# Altium PCB MainBoard.PcbDoc
Units mm, origin at the board's own origin, x right, y up, seen from the top; angles counter-clockwise.
Board outline 28.5 x 23.5 mm, 2 copper layers (Top1, Bottom4), stack 1.071 mm thick; 34 components, 52 nets, 216 pads, 114 vias.
Unrouted connection lines stored in the file: 28.
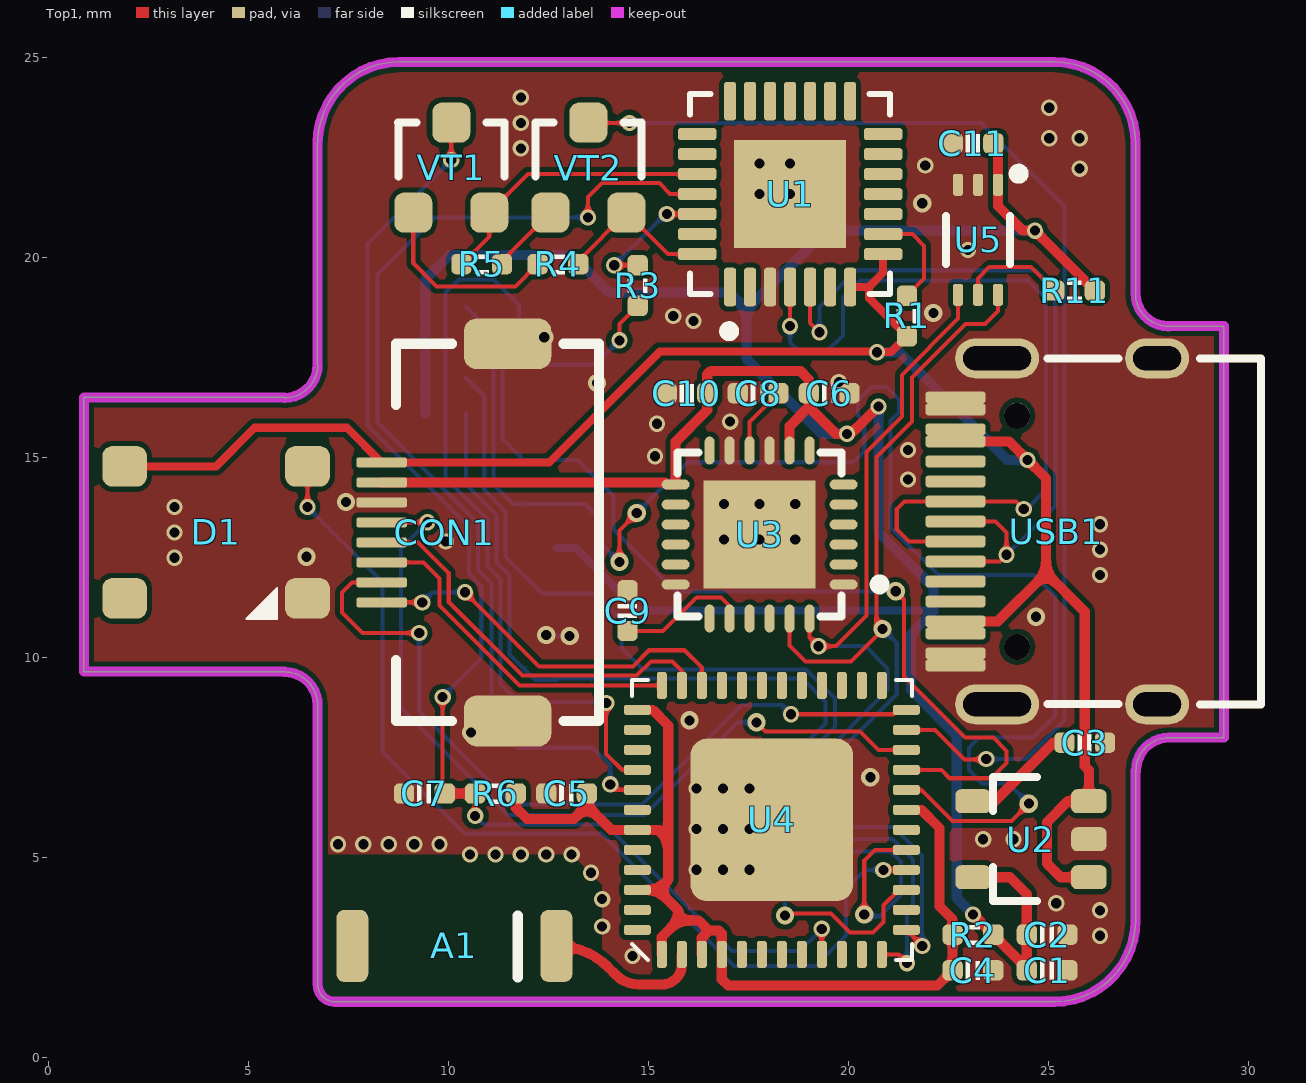
[diagram p0: Top1 view]
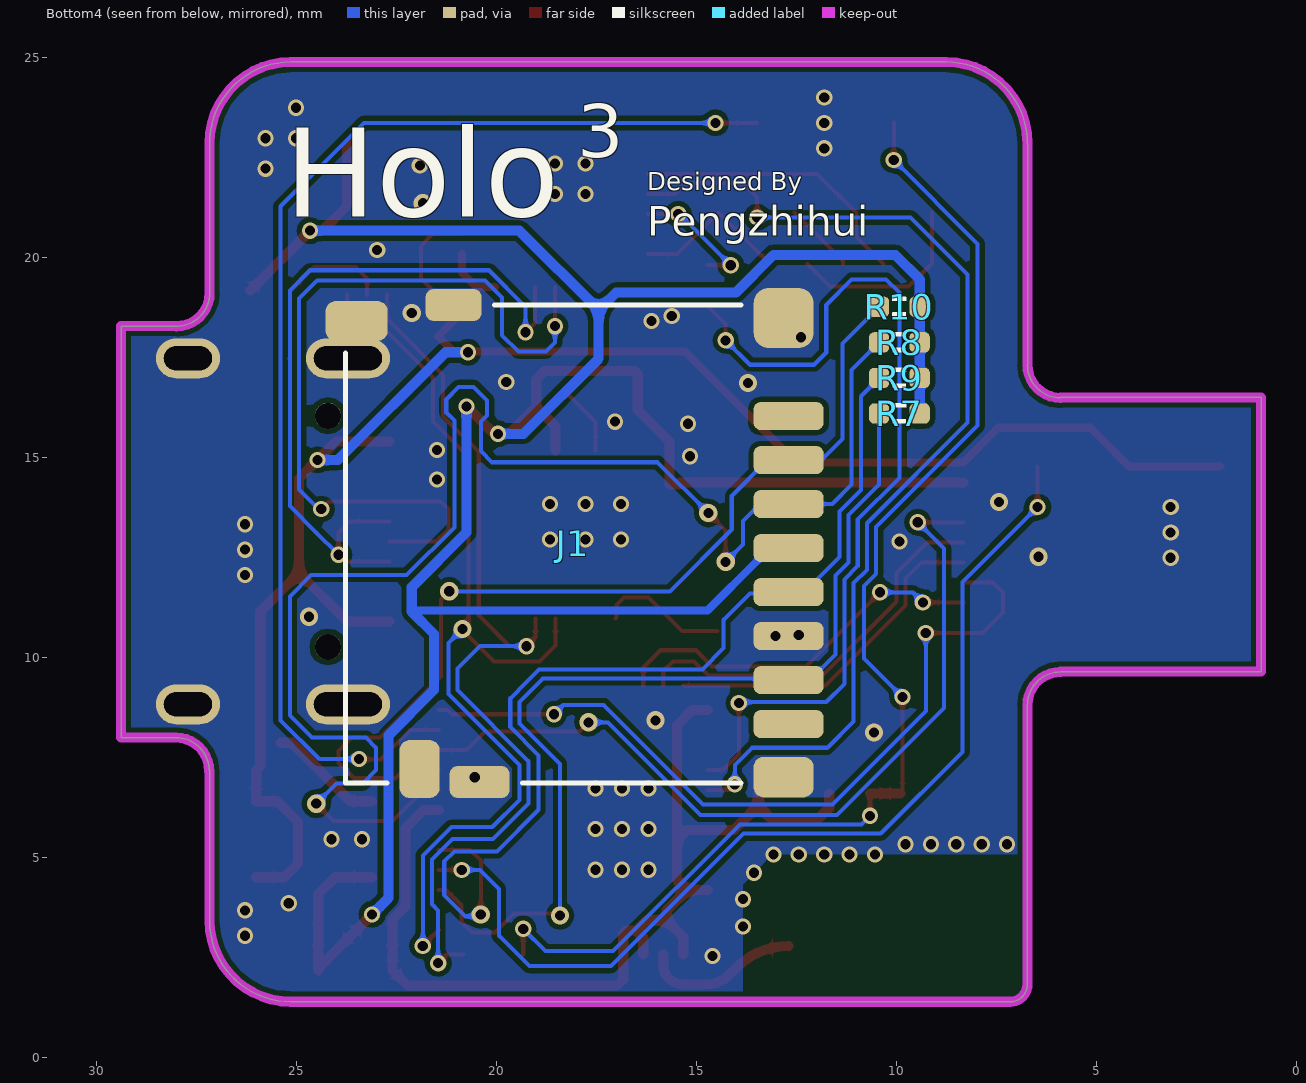
[diagram p1: Bottom4 view, seen from below]
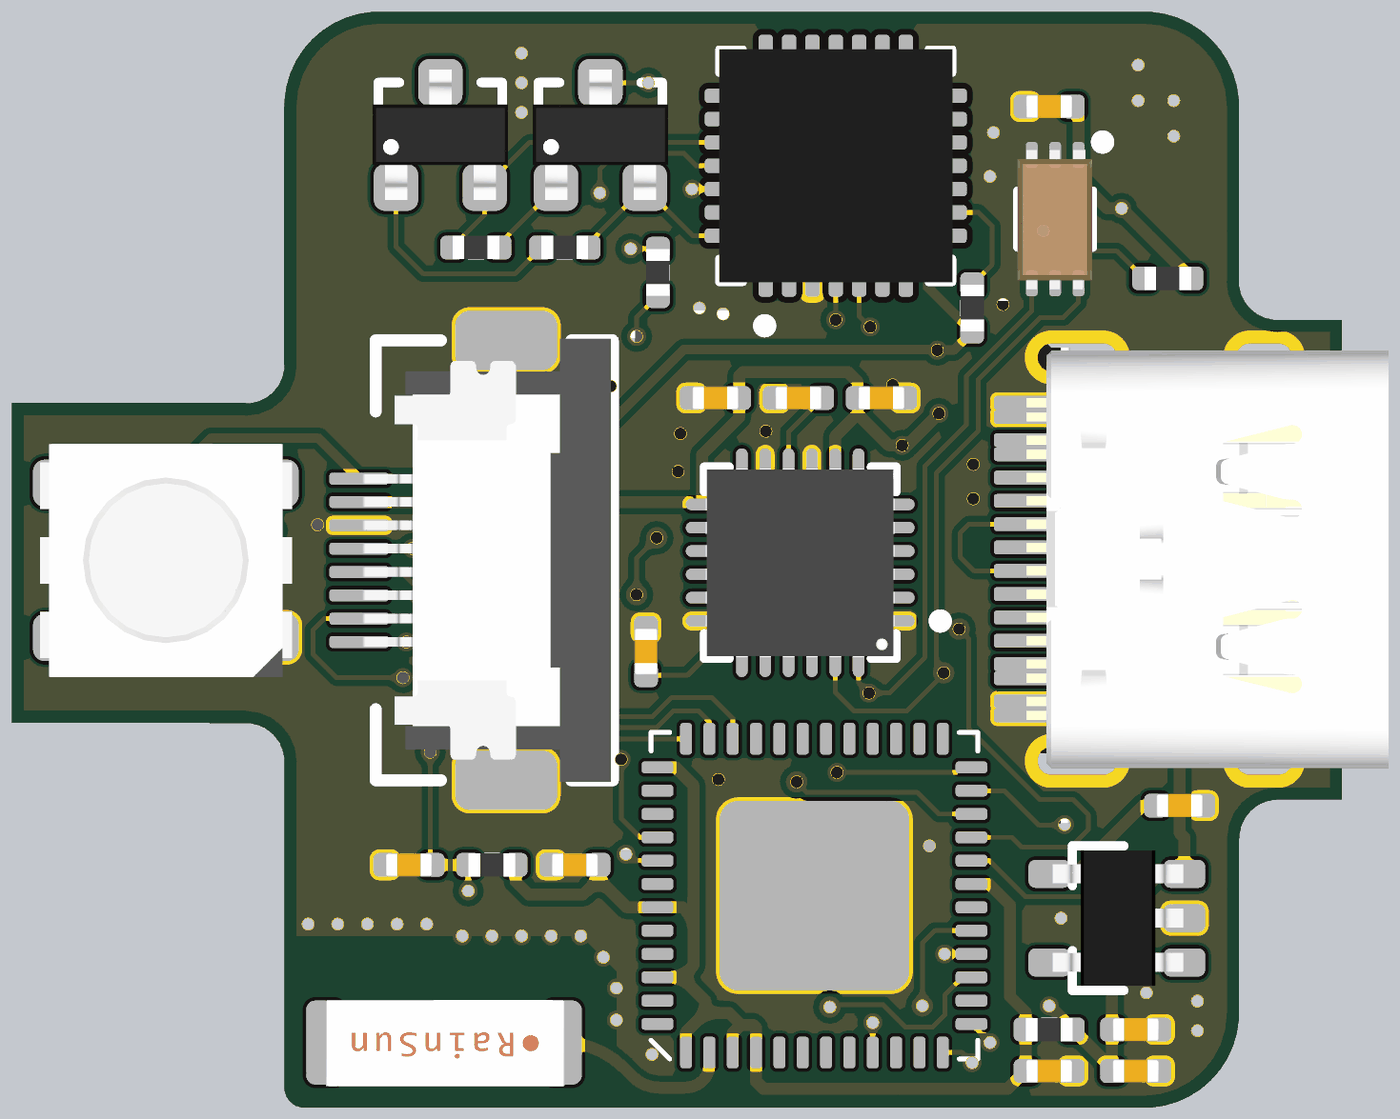
[diagram p2: 3D render of the assembled board from above, using the file's embedded part models]
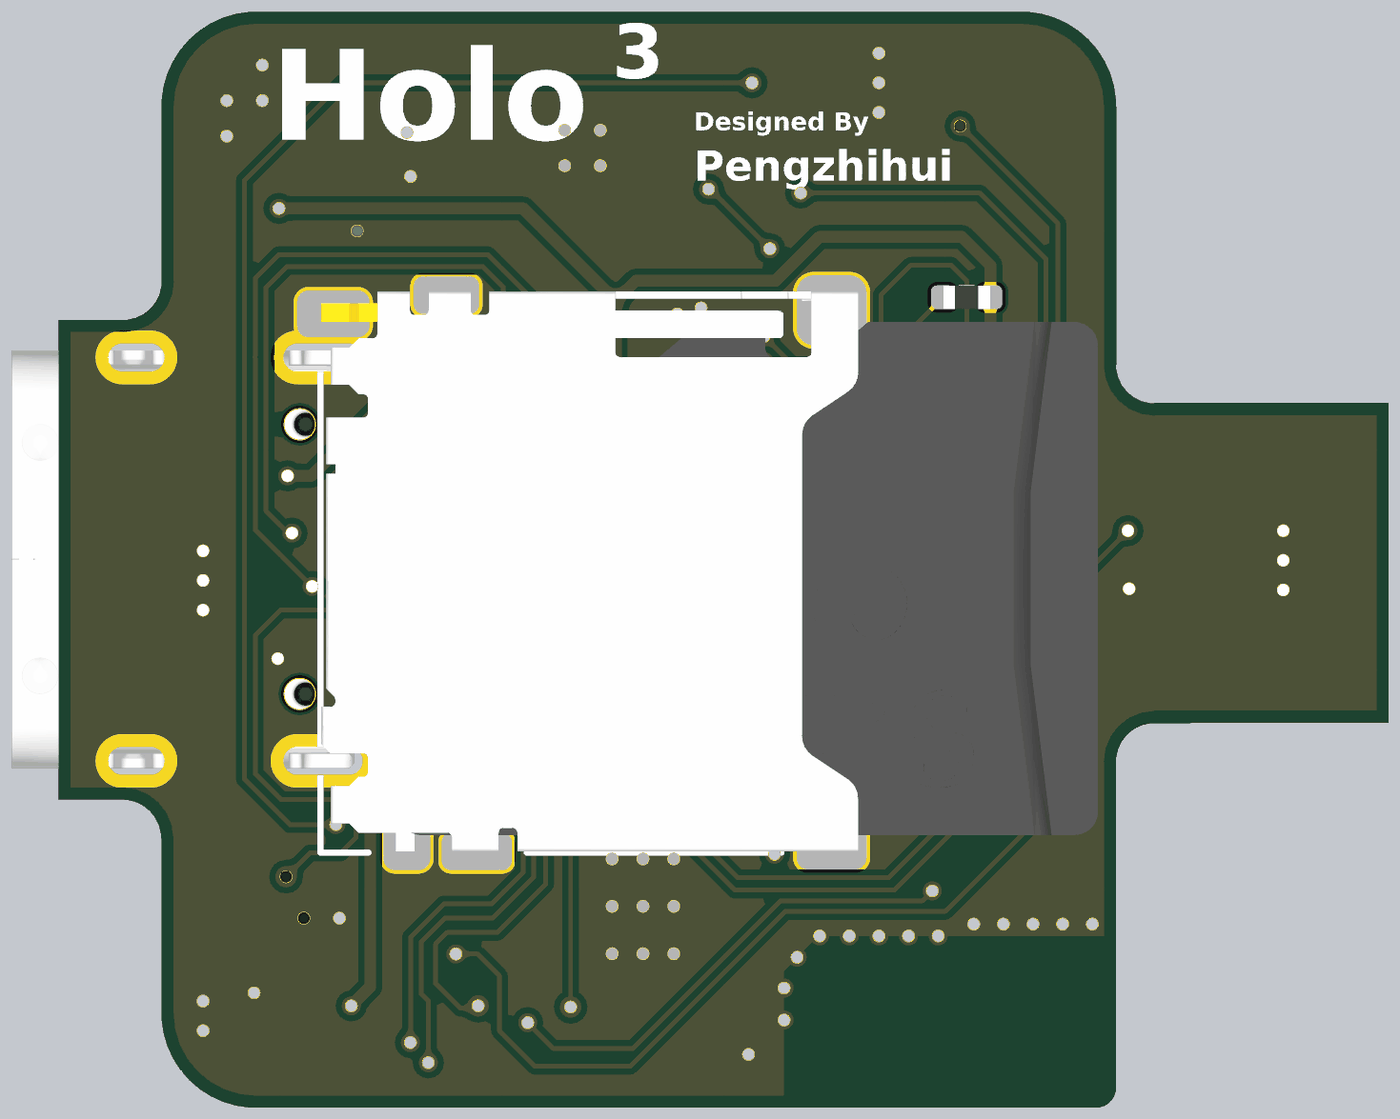
[diagram p3: 3D render of the assembled board from below, using the file's embedded part models]

## Layer stack, top to bottom
Top Solder: solder mask 0.0102, Solder Resist, Dk 3.5
Top1: signal copper 0.0356
Dielectric 2: core 1, PP-006, Dk 4.2
Bottom4: signal copper 0.0356
Bottom Solder: solder mask 0.0102, Solder Resist, Dk 3.5

## Board outline
5.903,9.642 cw(c5.903,8.814) 6.731,8.814 6.731,1.831 ccw(c7.165,1.831) 7.165,1.397 25.146,1.397 ccw(c25.146,3.429) 27.178,3.429 27.178,7.173 27.188,7.173 cw(c28.016,7.173) 28.016,8.001 29.388,8.001 29.388,18.288 28.003,18.288 28.003,18.286 cw(c28.003,19.113) 27.176,19.113 27.178,19.113 27.178,22.86 ccw(c25.146,22.86) 25.146,24.892 8.763,24.892 ccw(c8.763,22.86) 6.731,22.86 6.726,22.86 6.726,17.323 6.731,17.323 cw(c5.903,17.323) 5.903,16.495 5.903,16.505 0.889,16.505 0.889,9.652

## Design rules (kind name [scope] priority, off if disabled: settings)
Clearance [All] p1: gap=0.127 ignorepadtopadclearanceinfootprint=FALSE
ComponentClearance [All] p1: gap=0 collisioncheckmode=3 verticalgap=0 showdistances=FALSE
DiffPairsRouting [All] p1: maxlimit=0.229 minlimit=0.229 mostfreqgap=0.229 toplayer_minwidth=0.102 toplayer_maxwidth=0.102 toplayer_prefwidth=0.102 bottomlayer_minwidth=0.102 bottomlayer_maxwidth=0.102 bottomlayer_prefwidth=0.102 maxuncoupledlength=12.7
FanoutControl Fanout_BGA [All] p1: bgadir=Out bgaviamode=Centered fanoutstyle=Auto fanoutdirection=Alternating viagrid=0.025 // Fanout_BGA (Default Rule)
HoleSize [All] p1: absolutevalues=TRUE maxlimit=254 minlimit=0.203 maxpercent=80.000 minpercent=20.000
MinimumSolderMaskSliver [All] p1 off: minsoldermaskwidth=0.051
PlaneClearance [All] p1: clearance=0.203
PlaneConnect [All] p1: planeconnectstyle=Direct reliefexpansion=0.508 reliefentries=4 reliefconductorwidth=0.254 reliefairgap=0.254
PolygonConnect [All] p1: connectstyle=Direct reliefconductorwidth=0.254 reliefentries=4 polygonreliefangle="90 Angle" airgapwidth=0.254
RoutingVias [All] p1: holewidth=0.203 width=0.406 viastyle="Through Hole" minholewidth=0.152 minwidth=0.305 maxholewidth=0.711 maxwidth=1.27
SilkToBoardRegionClearance [All] p1 off:
SilkToSilkClearance [All] p1: silktosilkclearance=0
SilkToSolderMaskClearance [IsPad] p1: minsilkscreentomaskgap=0 clearancetoexposedcopper=TRUE
SolderMaskExpansion [All] p1: expansion=0.076 istentingtop=FALSE
Width [All] p1: maxlimit=254 minlimit=0.102 preferedwidth=0.102
20 further rules are at their usual default settings.

## Classes and differential pairs
net class GND: GND

## Components (designator, comment, footprint, x,y, rotation, side; value= is the part's Value field where it differs from the comment)
A1 "RAINSUN" ANT-Rainsun-AN5120 10.16,2.794 r180 top
C1 "0.1uF" CAP_0402 24.968,2.184 r180 top value=0.1u
C2 "10uF" CAP_0402 24.968,3.073 r180 top value=0.1u
C3 "10nF" CAP_0402 25.908,7.874 r180 top value=0.1u
C4 "10uF" CAP_0402 23.114,2.184 r180 top value=0.1u
C5 "0.1uF" CAP_0402 12.954,6.604 r0 top value=0.1u
C6 "10nF" CAP_0402 19.52,16.612 r0 top value=0.1u
C7 "0.1uF" CAP_0402 9.398,6.604 r180 top value=0.1u
C8 "0.1uF" CAP_0402 17.742,16.612 r180 top value=0.1u
C9 "2.2nF" CAP_0402 14.478,11.176 r270 top value=0.1u
C10 "0.1uF" CAP_0402 15.964,16.612 r0 top value=0.1u
C11 "0.1uF" CAP_0402 23.114,22.86 r180 top value=0.1u
CON1 "FFC_0.5_8" FFC_0.5_8 10.592,13.132 r90 top
D1 "RGB" LED_5050_WS2812B 4.191,13.132 r0 top
J1 "TF-Socket" "TF-Card-Amphenol with TF" 12.7,12.741 r90 bottom locked
R1 "10K" RES_0402 21.463,18.542 r90 top value=22R
R2 "0R" RES_0402 23.114,3.073 r180 top value=22R
R3 "200R" RES_0402 14.732,19.304 r90 top value=22R
R4 "12K" RES_0402 12.738,19.837 r180 top value=22R
R5 "12K" RES_0402 10.833,19.837 r0 top value=22R
R6 "10K" RES_0402 11.176,6.604 r180 top value=22R
R7 "10K" RES_0402 9.931,16.104 r0 bottom value=22R
R8 "10K" RES_0402 9.931,17.882 r0 bottom value=22R
R9 "10K" RES_0402 9.931,16.993 r0 bottom value=22R
R10 "10K" RES_0402 9.931,18.771 r0 bottom value=22R
R11 "10K" RES_0402 25.654,19.177 r0 top value=22R
U1 "CP2102" QFN-28 18.542,21.59 r90 top value=Value
U2 "LP2992 3V3" SOT23-5 24.511,5.461 r180 top
U3 "MPU6050" QFN-24 17.78,13.081 r180 top
U4 "ESP32_SIP" QFN-48_7X7 18.085,5.944 r90 top
U5 "BH1750FVI-TR" BH1750FVI 23.241,20.447 r270 top
USB1 "Type-C" Type-C-TOP 25.197,13.157 r0 top
VT1 "S8050" SMT_TRIODE_NPN 10.071,22.25 r0 top
VT2 "S8050" SMT_TRIODE_NPN 13.5,22.25 r0 top

## Footprints (in the part's own frame and the unit in brackets; to place one, negate y for a bottom-side part, rotate by r counter-clockwise, add the part's x,y. Pads: shape width x height; smd on the part's side, far side on the other; paste and mask are expansions set on the pad)
ANT-Rainsun-AN5120 [mm] "选择焊盘"
  rrect50% 0.8x1.8 smd: 1(-2.54,0) ""(2.563,0)
  silkscreen extent -1.57,-0.76 -1.57,0.79, body extent -2.57,-0.91 2.54,0.94, height 1.32
BH1750FVI [mm]
  rrect50% 0.55x0.25 smd paste+0 mask+0: 1(-1.375,0.5) 2(-1.375,0) 3(-1.375,-0.5) 4(1.375,-0.5) 5(1.375,0) 6(1.375,0.5)
  silkscreen extent -1.78,-0.8 0.6,1.14, body extent -1.49,-0.81 1.51,0.79, height 0.77
CAP_0402 [mil]
  rrect50% 20x20 smd: 1(-20,0) 2(20,0)
  silkscreen extent -7,-9 7,9, body extent -20,-10 20,10, height 20
FFC_0.5_8 [mil]
  rrect50% 50x86 smd: 0(-185.63,-35) 0(185.63,-35)
  rrect50% 10x50 smd: 1(-68.9,89) 2(-49.21,89) 3(-29.53,89) 4(-9.84,89) 5(9.84,89) 6(29.53,89) 7(49.21,89) 8(68.9,89)
  silkscreen extent -186,-125 186,75, body extent -187,-124 187,87, height 82
LED_5050_WS2812B [mil]
  rrect50% 44x40 smd: 1(-90,65) 2(-90,-65) 3(90,-65) 4(90,65)
  silkscreen extent 30,-85 60,-55, body extent -106,-98 106,98, height 69
QFN-24 [mm] "QFN, 24-Leads, Body 4.1x4.1mm (max), Pitch 0.50mm, IPC Low Density"
  oval 0.7x0.25 smd: 1(-2.1,1.25) 2(-2.1,0.75) 3(-2.1,0.25) 4(-2.1,-0.25) 5(-2.1,-0.75) 6(-2.1,-1.25) 13(2.1,-1.25) 14(2.1,-0.75) 15(2.1,-0.25) 16(2.1,0.25) 17(2.1,0.75) 18(2.1,1.25)
  oval 0.25x0.7 smd: 7(-1.25,-2.1) 8(-0.75,-2.1) 9(-0.25,-2.1) 10(0.25,-2.1) 11(0.75,-2.1) 12(1.25,-2.1) 19(1.25,2.1) 20(0.75,2.1) 21(0.25,2.1) 22(-0.25,2.1) 23(-0.75,2.1) 24(-1.25,2.1)
  rect 2.8x2.7 smd: ""(0,0)
  silkscreen extent -3.13,-2.05 2.05,2.05, body extent -2.02,-2.02 2.02,2.02, height 0.95
QFN-28 [mil]
  rrect50% 38x12 smd mask+5: 1(-91.5,59.06) 2(-91.5,39.37) 3(-91.5,19.68) 4(-91.5,0) 5(-91.5,-19.69) 6(-91.5,-39.37) 7(-91.5,-59.06) 15(91.5,-59.06) 16(91.5,-39.37) 17(91.5,-19.69) 18(91.5,0) 19(91.5,19.68) 20(91.5,39.37) 21(91.5,59.06)
  rrect50% 12x38 smd mask+5: 8(-59.06,-91.5) 9(-39.37,-91.5) 10(-19.68,-91.5) 11(0,-91.5) 12(19.69,-91.5) 13(39.37,-91.5) 14(59.06,-91.5) 22(59.06,91.5) 23(39.37,91.5) 24(19.69,91.5) 25(0,91.5) 26(-19.68,91.5) 27(-39.37,91.5) 28(-59.06,91.5)
  rect 106.3x110.24 smd: 29(0,0)
  silkscreen extent -140,-98 98,98, body extent -98,-98 98,98, height 35
QFN-48_7X7 [mm]
  rrect20% 4.064x4.064 smd: 0(0,0)
  rrect50% 0.675x0.25 smd: 1(-3.363,2.75) 2(-3.363,2.25) 3(-3.363,1.75) 4(-3.363,1.25) 5(-3.363,0.75) 6(-3.363,0.25) 7(-3.363,-0.25) 8(-3.363,-0.75) 9(-3.363,-1.25) 10(-3.363,-1.75) 11(-3.363,-2.25) 12(-3.363,-2.75) 25(3.363,-2.75) 26(3.363,-2.25) 27(3.363,-1.75) 28(3.363,-1.25) 29(3.363,-0.75) 30(3.363,-0.25) 31(3.363,0.25) 32(3.363,0.75) 33(3.363,1.25) 34(3.363,1.75) 35(3.363,2.25) 36(3.363,2.75)
  rrect50% 0.25x0.675 smd: 13(-2.75,-3.363) 14(-2.25,-3.363) 15(-1.75,-3.363) 16(-1.25,-3.363) 17(-0.75,-3.363) 18(-0.25,-3.363) 19(0.25,-3.363) 20(0.75,-3.363) 21(1.25,-3.363) 22(1.75,-3.363) 23(2.25,-3.363) 24(2.75,-3.363) 37(2.75,3.363) 38(2.25,3.363) 39(1.75,3.363) 40(1.25,3.363) 41(0.75,3.363) 42(0.25,3.363) 43(-0.25,3.363) 44(-0.75,3.363) 45(-1.25,3.363) 46(-1.75,3.363) 47(-2.25,3.363) 48(-2.75,3.363)
  silkscreen extent -3.5,-3.5 3.5,3.5, body extent -3.5,-3.5 3.5,3.5, height 1
RES_0402 [mil]
  rrect50% 20x20 smd: 1(-20,0) 2(20,0)
  silkscreen extent -7,-10 7,10, body extent -20,-10 20,10, height 14
SMT_TRIODE_NPN [mm] "Surface mount NPN transistor, package SOT-23"
  rrect50% 0.95x1 smd: 1(-0.95,-1.125) 2(0.95,-1.125) 3(0,1.125)
  silkscreen extent -1.33,-0.22 1.32,1.13, body extent -1.45,-1.4 1.45,1.4, height 1.3
SOT23-5 [mm] "SOT23, 3-Leads, Body 3.1x3.0mm (max), Pitch 0.95mm, IPC Medium Density"
  rrect50% 0.889x0.6 smd: 1(-1.5,0.95) 2(-1.5,0) 3(-1.5,-0.95) 4(1.396,-0.95) 5(1.396,0.95)
  silkscreen extent -0.2,-1.55 0.9,1.55, body extent -1.48,-1.45 1.32,1.45, height 1.2
"TF-Card-Amphenol with TF" [mm]
  rrect50% 0.7x1.75 smd: 1(3.3,0) 2(2.2,0) 3(1.1,0) 4(0,0) 5(-1.1,0) 6(-2.2,0) 7(-3.3,0) 8(-4.4,0)
  rrect50% 1x1.55 smd: 9(5.675,10.8)
  rrect50% 1.45x1 smd: 10(-5.525,9.225)
  rrect50% 1.5x1.5 smd: S1(5.75,0.125)
  rrect50% 1.016x1.5 smd: S2(-5.727,0.125)
  rrect50% 0.8x1.4 smd: S3(6.075,8.375)
  rrect50% 0.8x1.5 smd: S4(-5.85,7.725)
  silkscreen extent -5.87,1.19 6.07,11.07, body extent -5.85,-5.58 6.15,11.06, height 1.69
Type-C-TOP [mm]
  round 0.65 hole 0.65: 0(-0.98,-2.89) 0(-0.98,2.89)
  oval 1.6x1 hole 0.6 slot 1.2 at 0 deg: 1(2.52,4.325) 2(2.52,-4.325)
  oval 2.1x1 hole 0.6 slot 1.7 at 0 deg: 3(-1.48,-4.325) 4(-1.48,4.325)
  rrect50% 1.5x0.3 smd: A1(-2.52,-3.35) A4(-2.52,-2.55) A5(-2.52,-1.25) A6(-2.52,-0.25) A7(-2.52,0.25) A8(-2.52,1.25) A9(-2.52,2.55) A12(-2.52,3.35) B1(-2.52,3.05) B4(-2.52,2.25) B5(-2.52,1.75) B6(-2.52,0.75) B7(-2.52,-0.75) B8(-2.52,-1.75) B9(-2.52,-2.25) B12(-2.52,-3.05)
  silkscreen extent -0.22,-4.33 5.12,4.33, body extent -2.57,-4.48 5.18,4.48, height 3.26

## Part data
A1: library part ANT-Rainsun-AP5120
C1 C2 C3 C4 C5 C6 C7 C8 C9 C10 C11: library part 电容-0402, "Capacitor"
CON1: "FFC", System=Connector
D1: library part LED_5050_WS2812B, "LED", Type=5050
J1: "10 _8 + 2_ Position Card Connector Secure Digital - microSDâ„¢ Surface Mount, Right Angle Gold", Package=None, Availability=Unavailable, MF="Amphenol Commercial Products", MP=1140084168, Price=None, SnapEDA_Link=https://www.snapeda.com/parts/1140084168/Amphenol/view-part/4544529/?ref=snap
R1 R2 R3 R4 R5 R6 R7 R8 R9 R10 R11: library part 电阻-0402, "Resistor"
U1: "USB转TTL", MFG #1="SILICON LABS", PART DESC="SINGLE-CHIP USB TO UART BRIDGE, QFN28, RoHS.", PART NUMBER=CP2102, RefDes=RefDes, Type=DEV
U2: library part LP2992, "LDO"
U3: "六轴传感器"
U4: library part ESP32-PICO
USB1: library part USB-Type-C-TOP
VT1 VT2: library part SMT_TRIODE_NPN, "Surface mount NPN transistor, package SOT-23"

## Via types
v1: diameter 0.406, hole 0.254, Top1 to Bottom4, tented both sides, 94 vias
v2: diameter 0.457, hole 0.254, Top1 to Bottom4, tented both sides, 20 vias

## Nets (pads, with @x,y where several pads share a name; then routed paths per layer and width w, separated by ;. In a path a pad name is that pad's centre, name@x,y a point inside that pad or via, vN(x,y) a via of type N, cw(c..) or ccw(c..) an arc to the next point about the centre after c; other vN are vias at no path point)
3V3: C1.2 C2.2 C6.1 C10.2 C11.1 CON1.7 J1.4 R2.1 R7.1 R8.1 R9.1 R10.1 R11.2 U2.5 U3.8 U3.13 U5.1 | length 76.6
  Top1 w0.254: CON1.7 15.408,14.382 15.459,14.331 U3.13 15.68,15.401 16.472,16.192 C10.2 16.472,17.081 16.561,17.17 18.796,17.17 19.012,16.954 C6.1 19.012,16.269 ; U3.8 18.53,15.787 19.012,16.269 ; v1(20.752,16.281) 20.066,15.596 19.685,15.596 19.012,16.269 ; v1(23.114,3.581) R2.1 C1.2@24.46,2.235 ; U2.5 24.039,4.511 24.46,4.089 C2.2 C1.2@24.46,2.235 ; C11.1 23.741,22.741 U5.1 23.741,21.293 24.359,20.676 v1(24.663,20.676) R11.2 ; C1.2 C1.2@24.46,2.235
  Bottom4 w0.203: J1.4 13.185,12.741 13.473,12.453 13.473,12.435 14.732,11.176 22.123,11.176
  Bottom4 w0.254: R7.1 R9.1 R8.1 R10.1 9.423,19.456 10.033,20.066 13.081,20.066 14.021,19.126 17.018,19.126 17.45,18.694 ; v1(19.964,15.596) 19.329,15.596 17.45,17.475 17.45,18.694 ; v1(20.752,16.281) 20.752,13.132 22.123,11.76 22.123,11.151 21.565,10.592 21.565,9.195 22.708,8.052 22.708,3.988 v1(23.114,3.581) ; v1(24.663,20.676) 19.431,20.676 17.45,18.694
3V3A: C4.2 C5.2 R2.2 R6.1 U4.1 U4.3 U4.4 U4.19 U4.37 U4.43 U4.46 | length 26.5
  Top1 w0.254: R6.1 11.684,6.248 11.963,5.969 13.132,5.969 13.462,6.299 ; C5.2 13.462,6.299 ; U4.46 15.237,4.194 ; U4.37 15.106,8.694 15.494,8.306 15.494,5.461 ; U4.1 15.335,3.016 15.748,3.429 ; U4.3 16.335,3 16.51,3.175 ; U4.19 21.823,6.194 22.276,5.74 22.276,3.785 22.606,3.454 R2.2 C4.2 22.225,1.803 16.993,1.803 16.835,1.961 U4.4 16.835,3.104 16.764,3.175 16.51,3.175 ; 13.462,6.299 14.068,5.694 U4.43 15.261,5.694 15.494,5.461 ; 15.237,4.194 15.494,4.45 15.494,5.461 ; 15.237,4.194 15.748,3.683 15.748,3.429 ; 15.748,3.429 16.256,3.429 16.51,3.175
BH_SCL: U3.23 U4.13 U5.6 | length 24.5
  Top1 w0.102: U3.23 18.53,10.299 18.923,9.906 20.066,9.906 20.853,10.693 v2(20.853,10.719) 20.701,10.871 20.701,15.011 21.59,15.9 21.59,17 22.929,18.339 23.419,18.339 23.741,18.661 U5.6 ; U4.13 v1(21.847,2.794)
  Bottom4 w0.102: v2(20.853,10.719) 21.209,10.363 21.209,9.093 19.431,7.315 19.431,6.445 20.11,5.766 21.133,5.766 21.844,5.055 21.844,2.797 v1(21.847,2.794)
BH_SDA: U3.24 U4.12 U5.4 | length 23.7
  Top1 w0.102: U3.24 19.03,10.51 v1(19.253,10.287) 19.685,10.287 20.447,11.049 20.447,15.138 21.336,16.027 21.336,17.069 22.741,18.474 U5.4 ; U4.12 21.244,2.581 v1(21.463,2.362)
  Bottom4 w0.102: v1(19.253,10.287) 20.422,10.287 20.98,9.728 20.98,9.188 19.202,7.41 19.202,7.391 19.202,6.35 20.091,5.461 21.107,5.461 21.615,4.953 21.615,3.835 21.463,3.683 v1(21.463,2.362)
CP_Rx: U1.25 U4.41 | length 26.3
  Top1 w0.102: v1(13.487,21.006) 13.487,21.514 13.835,21.861 15.273,21.861 15.545,21.59 U1.25 ; v1(14.046,6.833) 14.185,6.694 U4.41
  Bottom4 w0.102: v1(13.487,21.006) 9.652,21.006 8.23,19.583 8.23,15.875 10.744,13.36 10.744,12.192 11.074,11.862 11.074,9.253 11.074,8.407 11.735,7.747 13.614,7.747 14.046,7.315 v1(14.046,6.833)
CP_Tx: R3.1 U4.40 | length 22.8
  Top1 w0.102: v1(13.945,8.865) 13.945,7.595 14.346,7.194 U4.40 ; v1(14.275,17.932) 14.275,18.339 R3.1
  Bottom4 w0.102: v1(13.945,8.865) 13.919,8.89 11.76,8.89 11.303,9.347 11.303,11.956 10.973,12.287 10.973,13.455 9.931,14.496 9.931,19.126 10.262,19.456 11.125,19.456 11.76,18.821 11.76,17.628 12.065,17.323 13.665,17.323 v1(14.275,17.932)
DC: CON1.5 U4.22 | length 21.1
  Top1 w0.102: CON1.5 9.47,13.382 v1(9.474,13.386) ; v2(17.704,8.382) 17.932,8.153 20.295,8.153 20.754,7.694 U4.22
  Bottom4 w0.102: v1(9.474,13.386) 8.814,12.725 8.814,8.738 11.49,6.062 14.901,6.062 17.221,8.382 v2(17.704,8.382)
DTR: R4.1 U1.28 VT2.2 | length 4
  Top1 w0.102: R4.1 13.246,19.921 VT2.2 15.486,20.09 U1.28
EN: C7.1 R6.2 U4.9 VT1.3 | length 31.5
  Top1 w0.102: v1(9.855,9.017) 9.855,6.655 C7.1 ; v1(10.071,22.441) VT1.3 ; v1(10.668,6.045) R6.2 ; U4.9 v1(19.335,3.22)
  Top1 w0.254: C7.1 R6.2
  Bottom4 w0.102: v1(9.855,9.017) 10.287,9.449 10.82,9.982 10.82,11.793 10.516,12.097 10.516,12.167 10.516,13.266 7.976,15.806 7.976,20.345 v1(10.071,22.441) ; v1(10.668,6.045) 10.88,5.833 13.921,5.833 17.087,2.667 18.781,2.667 v1(19.335,3.22)
FLASH_CLK: U4.31
FLASH_CS: U4.25
FLASH_SD0: U4.27
FLASH_SD1: U4.33
FLASH_SD2: U4.30
FLASH_SD3: U4.32
GND: C1.1 C2.1 C3.1 C4.1 C5.1 C6.2 C7.2 C8.2 C9.1 C10.1 C11.2 CON1.0 CON1.6 D1.3 J1.6 J1.9 J1.10 J1.S1 J1.S2 J1.S3 J1.S4 U1.3 U1.29 U2.2 U3. U3.1 U3.9 U3.11 U3.18 U4.0 U5.2 U5.3 USB1.1 USB1.2 USB1.3 USB1.4 USB1.A1 USB1.A12 USB1.B1 USB1.B12 | length 0.3
  Bottom4 w0.102: J1.6 v2(13.03,10.541)
  other v1: 14.605,2.54 26.289,3.048 13.843,3.277 26.289,3.683 25.197,3.861 13.843,3.962 13.564,4.623 16.205,4.699 16.866,4.699 17.526,4.699 10.541,5.08 11.176,5.08 11.811,5.08 12.446,5.08 13.081,5.08 7.239,5.334 7.874,5.334 8.509,5.334 9.144,5.334 9.779,5.334 23.368,5.461 24.13,5.461 16.205,5.715 16.866,5.715 17.526,5.715 16.205,6.731 16.866,6.731 17.526,6.731 26.289,12.065 3.15,12.497 26.289,12.7 9.931,12.903 16.891,12.954 17.78,12.954 18.669,12.954 3.15,13.132 26.289,13.335 3.15,13.767 16.891,13.843 17.78,13.843 18.669,13.843 21.488,14.453 15.164,15.037 21.488,15.189 15.215,15.85 17.043,15.9 19.761,16.891 16.129,18.415 15.621,18.542 22.987,20.193 17.78,21.59 18.542,21.59 25.781,22.225 21.92,22.301 17.78,22.352 18.542,22.352 11.811,22.733 25.019,22.987 25.781,22.987 11.811,23.368 25.019,23.749 11.811,24.003
  other v2: 20.549,7.01 10.566,8.128 16.027,8.433 12.446,10.566 24.689,11.024 6.452,12.522 7.442,13.894 13.716,16.866 12.395,18.009 22.123,18.618 21.844,21.361
GPIO0: U4.23 VT2.3 | length 30.3
  Top1 w0.102: VT2.3 13.507,23.368 v1(14.529,23.368) ; U4.23 22.159,8.194 22.898,7.455 23.431,7.455 v1(23.444,7.468)
  Bottom4 w0.102: v1(14.529,23.368) 23.317,23.368 25.4,21.285 25.4,17.546 cw(c24.267,17.482) 25.4,17.418 25.4,8.433 24.435,7.468 v1(23.444,7.468)
GPIO4: CON1.2 U4.24 | length 20
  Top1 w0.102: CON1.2 7.589,11.882 7.341,11.633 7.341,11.125 7.849,10.617 v1(9.271,10.617) ; v1(18.567,8.585) 21.12,8.585 21.228,8.694 U4.24
  Bottom4 w0.102: v1(9.271,10.617) 9.271,8.661 11.604,6.328 14.837,6.328 17.323,8.814 18.339,8.814 v1(18.567,8.585)
GPIO5: CON1.1 U4.34 | length 9.7
  Top1 w0.102: CON1.1 v1(9.345,11.382) ; v1(10.414,11.633) 12.268,9.779 14.612,9.779 15.018,10.185 15.9,10.185 16.335,9.751 U4.34
  Bottom4 w0.102: v1(9.345,11.382) 9.596,11.633 v1(10.414,11.633)
GPIO9: U4.28
GPIO10: U4.29
GPIO12: U4.18
GPIO13: J1.3 R8.2 U4.20 | length 38
  Top1 w0.102: v2(14.275,12.395) 14.275,13.183 v2(14.707,13.614) ; U4.20 21.831,6.694 22.606,5.918 24.079,5.918 v2(24.511,6.35)
  Bottom4 w0.102: R8.2 11.125,17.196 11.125,14.326 11.61,13.841 J1.3 13.413,13.841 13.843,13.411 13.843,12.827 v2(14.275,12.395) ; v2(14.707,13.614) 15.977,14.884 20.117,14.884 20.396,15.164 20.396,15.9 20.244,16.053 20.244,16.434 20.574,16.764 20.955,16.764 21.26,16.459 21.26,16.129 21.057,15.926 21.057,13.258 22.25,12.065 24.638,12.065 25.171,11.532 25.171,8.56 24.613,8.001 23.266,8.001 23.012,7.747 23.012,7.188 23.343,6.858 24.003,6.858 v2(24.511,6.35)
GPIO14: J1.5 R9.2 U4.17 | length 25.5
  Top1 w0.102: v2(20.396,3.581) 20.396,4.928 20.662,5.194 U4.17
  Bottom4 w0.102: R9.2 10.897,16.535 10.897,14.192 11.43,13.658 11.43,12.522 12.347,11.605 13.668,11.605 14.326,10.947 14.326,10.236 14.859,9.703 18.364,9.703 18.941,9.703 19.253,9.391 19.66,8.985 19.66,8.262 18.948,7.551 18.948,6.198 19.99,5.156 21.057,5.156 21.311,4.902 21.311,4.064 20.777,3.531 20.447,3.531 v2(20.396,3.581)
GPIO15: J1.2 R10.2 U4.21 | length 24.2
  Top1 w0.102: v2(21.184,11.659) 21.387,11.455 21.387,9.525 22.911,8.001 23.622,8.001 23.952,7.671 23.952,7.366 23.571,6.985 22.53,6.985 22.321,7.194 U4.21
  Bottom4 w0.102: R10.2 11.354,17.856 11.354,15.469 11.881,14.941 J1.2 13.228,14.941 14.122,14.046 14.122,13.208 15.672,11.659 v2(21.184,11.659)
GPIO18: CON1.4 U4.35 | length 9.9
  Top1 w0.102: CON1.4 9.242,12.882 10.008,12.116 10.008,11.398 11.855,9.55 14.707,9.55 15.062,9.906 15.596,9.906 15.835,9.667 U4.35
GPIO19: U4.38
GPIO21: U4.42
GPIO22: U4.39
GPIO23: CON1.3 U4.36 | length 8.7
  Top1 w0.102: CON1.3 9.38,12.382 9.779,11.982 9.779,11.303 9.804,11.278 11.776,9.306 U4.36
GPIO25: U4.14
GPIO26: J1.7 R7.2 U4.15 | length 24.6
  Top1 w0.102: v2(18.415,3.556) 18.46,3.601 19.563,3.601 20.041,3.124 20.615,3.124 20.879,3.388 20.879,3.81 21.262,4.194 U4.15
  Bottom4 w0.102: R7.2 10.439,14.326 11.201,13.564 11.201,12.381 11.532,12.051 11.532,10.084 12.174,9.441 J1.7 12.733,9.474 18.847,9.474 19.431,8.89 19.431,8.357 18.415,7.341 v2(18.415,3.556)
GPIO27: D1.4 U4.16 | length 24.9
  Top1 w0.102: v1(6.477,13.767) D1.4 ; v1(20.873,4.694) U4.16
  Bottom4 w0.102: v1(6.477,13.767) 8.357,11.887 8.357,7.645 10.398,5.604 13.827,5.604 17.145,2.286 19.177,2.286 19.939,3.048 19.939,4.216 20.416,4.694 v1(20.873,4.694)
GPIO34: U4.10
GPIO35: U4.11
GPIO37: U4.6
GPIO38: U4.7
NetA1_1: A1.1 U4.2 | length 4
  Top1 w0.254: A1.1 cw(c12.7,0.954) 14.001,2.255 14.194,2.062 ccw(c14.757,2.626) 14.757,1.829 15.329,1.829 ccw(c15.329,2.349) 15.697,1.981 ccw(c15.365,2.313) 15.835,2.313 U4.2
NetC3_2: C3.2 U2.4 | length 2.9
  Top1 w0.254: U2.4 23.658,6.411 25.121,7.874 C3.2
NetC8_1: C8.1 U3.10 | length 1.7
  Top1 w0.102: U3.10 17.53,15.892 C8.1
NetC9_2: C9.2 U3.20 | length 3.3
  Top1 w0.102: C9.2 15.367,10.668 16.208,11.509 16.812,11.509 17.002,11.319 17.002,11.009 U3.20
NetR1_2: R1.2 U1.9 | length 2.6
  Top1 w0.102: U1.9 21.599,20.59 21.895,20.295 21.895,19.482 R1.2
NetR3_2: R3.2 U1.26 | length 3.2
  Top1 w0.102: v1(14.148,19.812) R3.2 ; v1(15.461,21.09) U1.26
  Bottom4 w0.102: v1(14.148,19.812) 15.426,21.09 v1(15.461,21.09)
NetR4_2: R4.2 VT1.1 | length 4.8
  Top1 w0.102: VT1.1 9.121,19.86 9.703,19.279 11.671,19.279 R4.2
NetR5_2: R5.2 VT2.1 | length 1.8
  Top1 w0.102: R5.2 11.341,19.916 VT2.1
NetR11_1: R11.1 U5.5 | length 2.7
  Top1 w0.102: U5.5 23.241,19.482 23.52,19.761 24.562,19.761 R11.1
RTS: R5.1 U1.24 VT1.2 | length 7.2
  Top1 w0.102: R5.1 11.021,20.533 VT1.2 11.986,22.09 U1.24
SENSOR_VN: U4.8
SENSOR_VP: U4.5
USB-PWR-DM: U1.5 USB1.A7 USB1.B7 | length 18.7
  Top1 w0.102: U1.5 19.042,18.372 v1(19.279,18.136) ; USB1.B7 23.786,12.407 v1(23.952,12.573) 23.952,13.132 23.677,13.407 USB1.A7
  Bottom4 w0.102: v1(19.279,18.136) 19.279,18.771 20.193,19.685 24.663,19.685 25.171,19.177 25.171,17.539 cw(c24.267,17.482) 25.171,17.425 25.171,13.792 24.51,13.131 v1(23.952,12.573)
USB-PWR-DP: U1.4 USB1.A6 USB1.B6 | length 20.3
  Top1 w0.102: v1(18.542,18.288) U1.4 ; USB1.A6 21.51,12.907 21.209,13.208 21.209,13.716 21.4,13.907 USB1.B6 24.193,13.907 v1(24.384,13.716)
  Bottom4 w0.102: v1(18.542,18.288) 18.542,17.882 18.771,17.653 19.456,17.653 19.863,18.059 19.863,18.999 20.295,19.431 24.486,19.431 24.943,18.974 24.943,17.532 cw(c24.267,17.482) 24.943,17.433 24.943,14.199 v1@24.409,13.665
VDD_5V: CON1.8 D1.1 R1.1 U1.7 U1.8 U2.1 U2.3 USB1.A4 USB1.A9 USB1.B4 USB1.B9 | length 47
  Top1 w0.203: D1.1 4.191,14.783 5.156,15.748 7.465,15.748 CON1.8 12.52,14.882 15.291,17.653 20.701,17.653 v1(20.717,17.637) 21.066,17.637 R1.1 20.511,18.986 20.511,19.266 ; U1.7 20.511,19.266 ; U1.8 20.866,19.621 20.511,19.266
  Top1 w0.254: USB1.B9 23.734,10.907 24.943,12.116 ; USB1.B4 24.014,15.407 v1(24.478,14.943) 24.943,14.478 24.943,12.116 ; U2.1 25.309,4.511 24.968,4.851 24.968,5.893 25.486,6.411 U2.3 26.011,7.187 25.908,7.29 25.908,11.151 24.943,12.116
  Bottom4 w0.254: v1(20.717,17.637) 21.276,17.637 23.97,14.943 v1(24.478,14.943)
pads on no net: A1. D1.2 J1.1 J1.8 U1.1 U1.2 U1.6 U1.10 U1.11 U1.12 U1.13 U1.14 U1.15 U1.16 U1.17 U1.18 U1.19 U1.20 U1.21 U1.22 U1.23 U1.27 U3.2 U3.3 U3.4 U3.5 U3.6 U3.7 U3.12 U3.14 U3.15 U3.16 U3.17 U3.19 U3.21 U3.22 U4.26 U4.44 U4.45 U4.47 U4.48 USB1.0 USB1.A5 USB1.A8 USB1.B5 USB1.B8

## Polygon pours and split planes (outlines as drawn)
GND on Top1 "GND_L01_P000" (solid, remove dead copper, pour order 0): 0.889,24.892 29.337,24.892 29.337,1.397 0.889,1.397
GND on Bottom4 "GND_L02_P001" (solid, remove dead copper, pour order 1): 0.889,24.892 29.337,24.892 29.337,1.397 0.889,1.397

## Keep-outs
Keep-Out Layer:
  lines w0.254: 5.903,9.642 cw(c5.903,8.814) 6.731,8.814 6.731,1.831 ccw(c7.165,1.831) 7.165,1.397 25.146,1.397 ccw(c25.146,3.429) 27.178,3.429 27.178,7.173 ; 5.903,9.652 0.889,9.652 0.889,16.505 5.903,16.505 ; 5.903,16.495 ccw(c5.903,17.323) 6.731,17.323 ; 6.726,17.323 6.726,22.86 ; 6.731,22.86 cw(c8.763,22.86) 8.763,24.892 25.146,24.892 cw(c25.146,22.86) 27.178,22.86 27.178,19.113 ; 27.176,19.113 ccw(c28.003,19.113) 28.003,18.286 ; 27.188,7.173 cw(c28.016,7.173) 28.016,8.001 29.388,8.001 29.388,18.288 28.003,18.288

## Other copper
Top1:
  pour cut-out: 6.35,5.08 13.081,5.08 13.843,4.318 13.843,0.889 6.35,0.889
Bottom4:
  pour cut-out: 6.35,5.08 13.113,5.08 13.843,4.318 13.843,0.889 6.35,0.889

## Silkscreen, mask and mechanical layers (free items; w line width, h text height)
Bottom Overlay:
  text "3" at 17.983,22.073 h2.29
  text "Designed By" at 16.231,21.539 h0.76
  text "Pengzhihui" at 16.231,20.295 h1.27
  text "Holo" at 25.298,20.295 h3.81
Drill Drawing:
  circle w0.254: c2.81,50.35 r0.847
  lines w0.254: 1.963,38.073 2.81,38.496 3.657,38.073 3.233,38.92 3.657,39.766 2.81,39.343 1.963,39.766 2.387,38.92 1.963,38.073 ; 1.963,43.576 3.657,43.576 2.81,41.883 1.963,43.576 ; 1.963,45.693 3.657,45.693 3.657,47.386 1.963,47.386 1.963,45.693
  lines w0.381: 0.445,36.93 335.935,36.93 ; 0.445,52.17 335.935,52.17 ; 14.437,33.12 14.437,55.98 ; 29.419,33.12 29.419,55.98 ; 57.351,33.12 57.351,55.98 ; 70.2,33.12 70.2,55.98 ; 88.838,33.12 88.838,55.98 ; 119.056,33.12 119.056,55.98 ; 134.038,33.12 134.038,55.98 ; 152.981,33.12 152.981,55.98 ; 183.198,33.12 183.198,55.98 ; 204.884,33.12 204.884,55.98 ; 238.757,33.12 238.757,55.98 ; 272.631,33.12 272.631,55.98 ; 300.309,33.12 300.309,55.98 ; 0.445,33.12 335.935,33.12 335.935,55.98 0.445,55.98 0.445,33.12
  text "Symbol" at 2.73,53.313 h1.83
  text "Count" at 15.58,53.313 h1.83
  text "Hole Size" at 30.562,53.313 h1.83
  text "Plated" at 58.494,53.313 h1.83
  text "Hole Type" at 71.343,53.313 h1.83
  text "Drill Layer Pair" at 89.981,53.313 h1.83
  text "Via/Pad" at 120.199,53.313 h1.83
  text "Pad Shape" at 135.181,53.313 h1.83
  text "Template" at 154.124,53.313 h1.83
  text "Description" at 184.341,53.313 h1.83
  text "Hole Tolerance (+)" at 206.027,53.313 h1.83
  text "Hole Tolerance (-)" at 239.9,53.313 h1.83
  text "Hole Length" at 273.774,53.313 h1.83
  text "Routed Path Length" at 301.452,53.313 h1.83
  text "2" at 15.58,49.503 h1.52
  text "23.62mil (0.600mm)" at 30.562,49.503 h1.52
  text "PTH" at 58.494,49.503 h1.52
  text "Slot" at 71.343,49.503 h1.52
  text "Top1 - Bottom4" at 89.981,49.503 h1.52
  text "Pad" at 120.199,49.503 h1.52
  text "Rounded" at 135.181,49.503 h1.52
  text "r160_100h60_120r100" at 154.124,49.503 h1.52
  text "47.24mil (1.200mm)" at 273.774,49.503 h1.52
  text "23.62mil (0.600mm)" at 301.452,49.503 h1.52
  text "2" at 15.58,45.693 h1.52
  text "23.62mil (0.600mm)" at 30.562,45.693 h1.52
  text "PTH" at 58.494,45.693 h1.52
  text "Slot" at 71.343,45.693 h1.52
  text "Top1 - Bottom4" at 89.981,45.693 h1.52
  text "Pad" at 120.199,45.693 h1.52
  text "Rounded" at 135.181,45.693 h1.52
  text "r210_100h60_170r100" at 154.124,45.693 h1.52
  text "66.93mil (1.700mm)" at 273.774,45.693 h1.52
  text "43.31mil (1.100mm)" at 301.452,45.693 h1.52
  text "2" at 15.58,41.883 h1.52
  text "25.59mil (0.650mm)" at 30.562,41.883 h1.52
  text "PTH" at 58.494,41.883 h1.52
  text "Round" at 71.343,41.883 h1.52
  text "Top1 - Bottom4" at 89.981,41.883 h1.52
  text "Pad" at 120.199,41.883 h1.52
  text "Rounded" at 135.181,41.883 h1.52
  text "c65h65" at 154.124,41.883 h1.52
  text "-" at 273.774,41.883 h1.52
  text "-" at 301.452,41.883 h1.52
  text "114" at 15.58,38.073 h1.52
  text "10.00mil (0.254mm)" at 30.562,38.073 h1.52
  text "PTH" at 58.494,38.073 h1.52
  text "Round" at 71.343,38.073 h1.52
  text "Top1 - Bottom4" at 89.981,38.073 h1.52
  text "Via" at 120.199,38.073 h1.52
  text "Rounded" at 135.181,38.073 h1.52
  text "(Mixed)" at 154.124,38.073 h1.52
  text "-" at 273.774,38.073 h1.52
  text "-" at 301.452,38.073 h1.52
  text "120 Total" at 15.58,34.263 h1.52
  text "Slot definitions :" at 2.73,30.581 h1.52
  text "Routed Path Length" at 28.961,30.581 h1.52
  text "= Calculated from tool start centre position to tool end centre position." at 56.969,30.581 h1.52
  text "Hole Length" at 28.961,28.041 h1.52
  text "= Routed Path Length + Tool Size = Slot length as defined in the PCB layout" at 46.558,28.041 h1.52